# EAGLE board JesseMakeISC2 (EAGLE 7.5.0), part 1 of 2
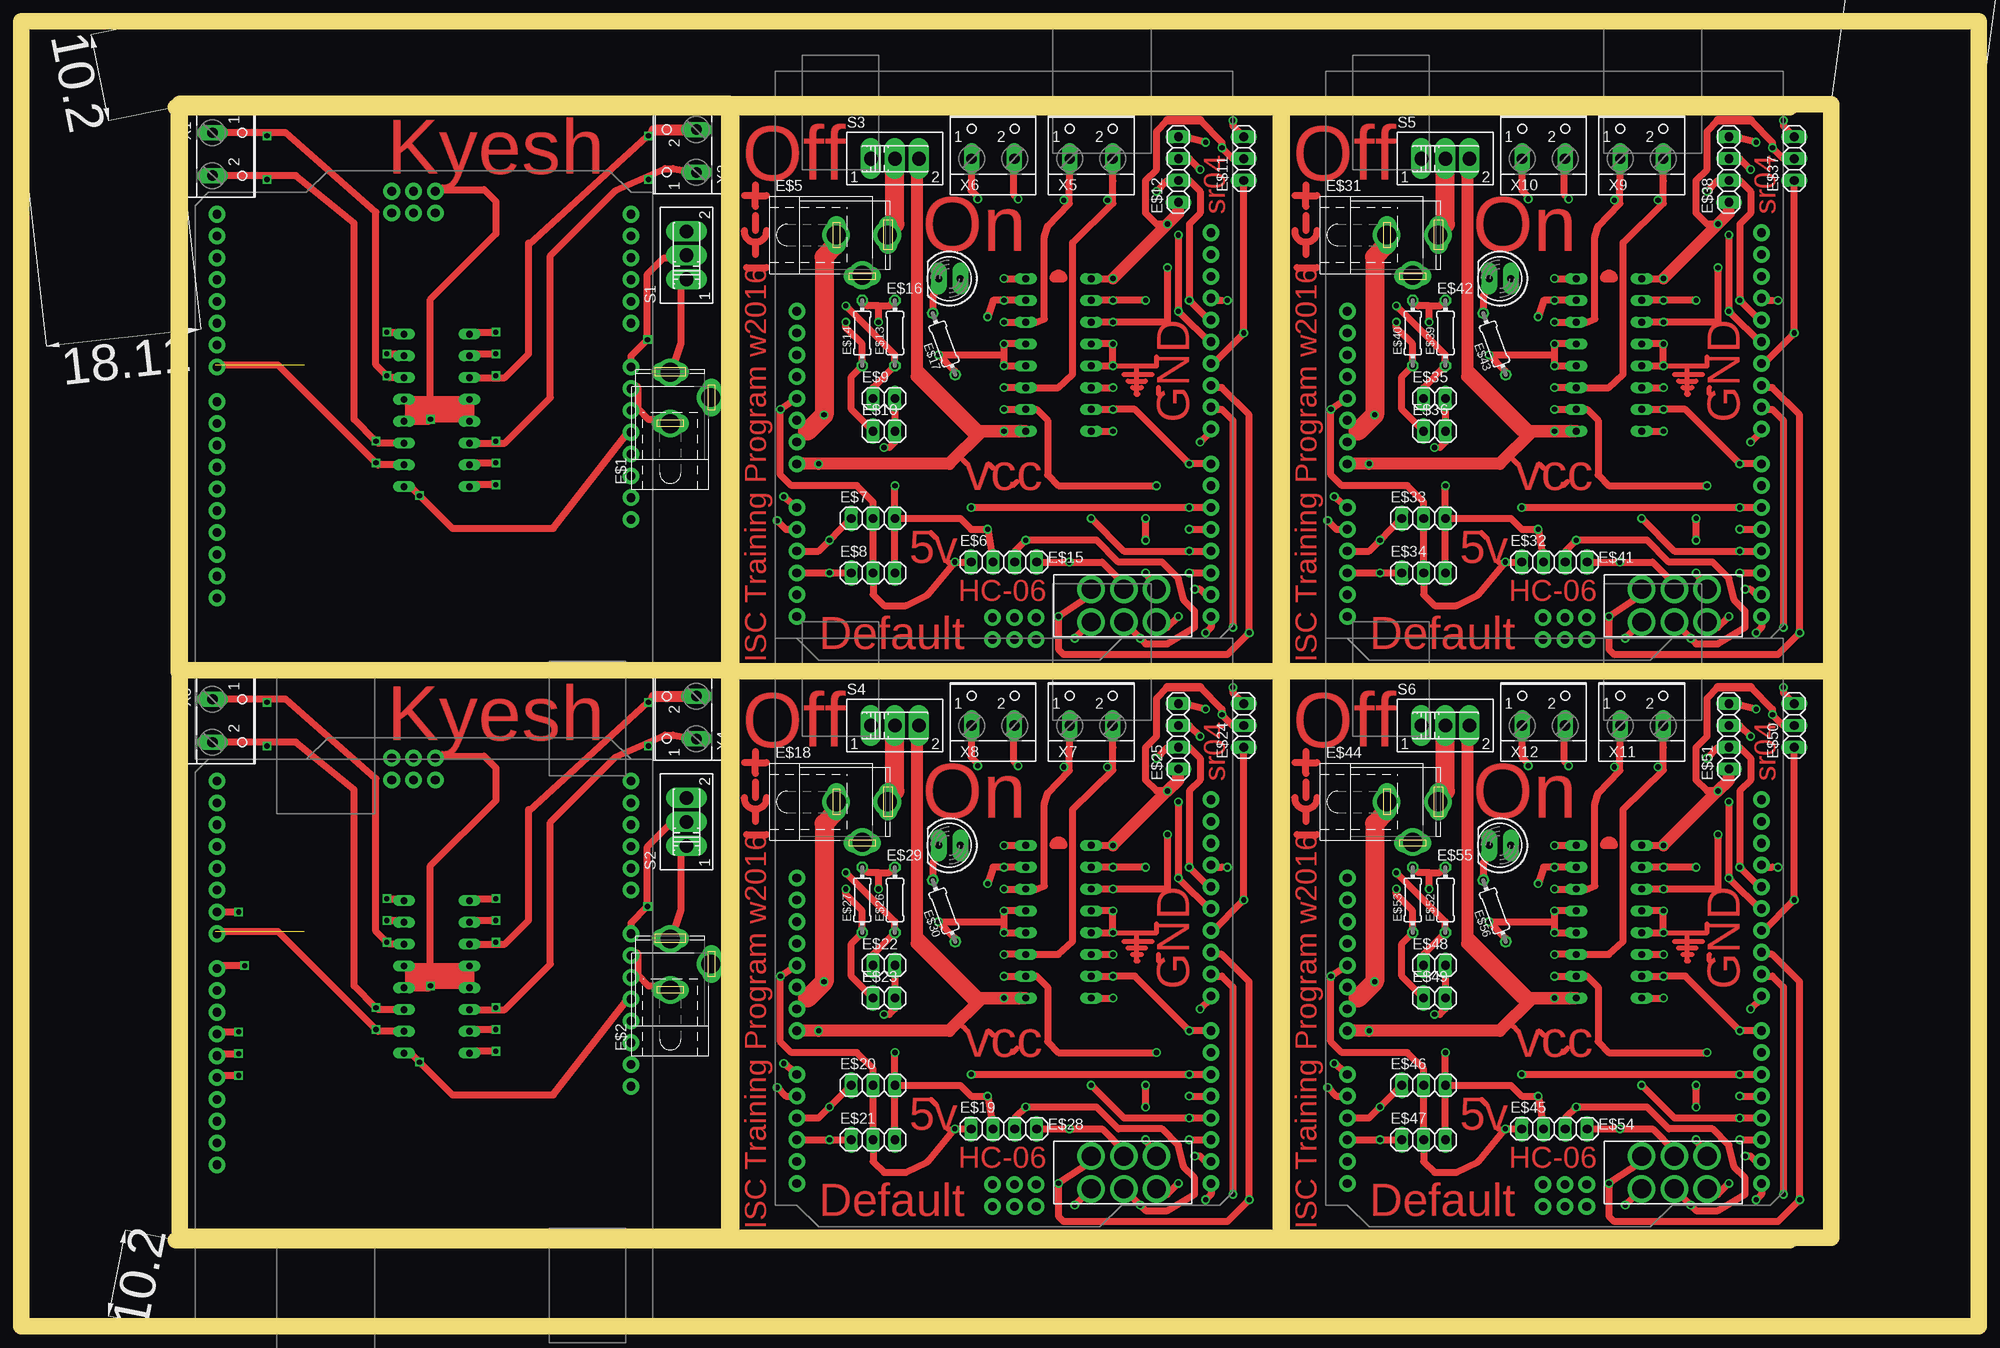
[diagram p0: board, top side]
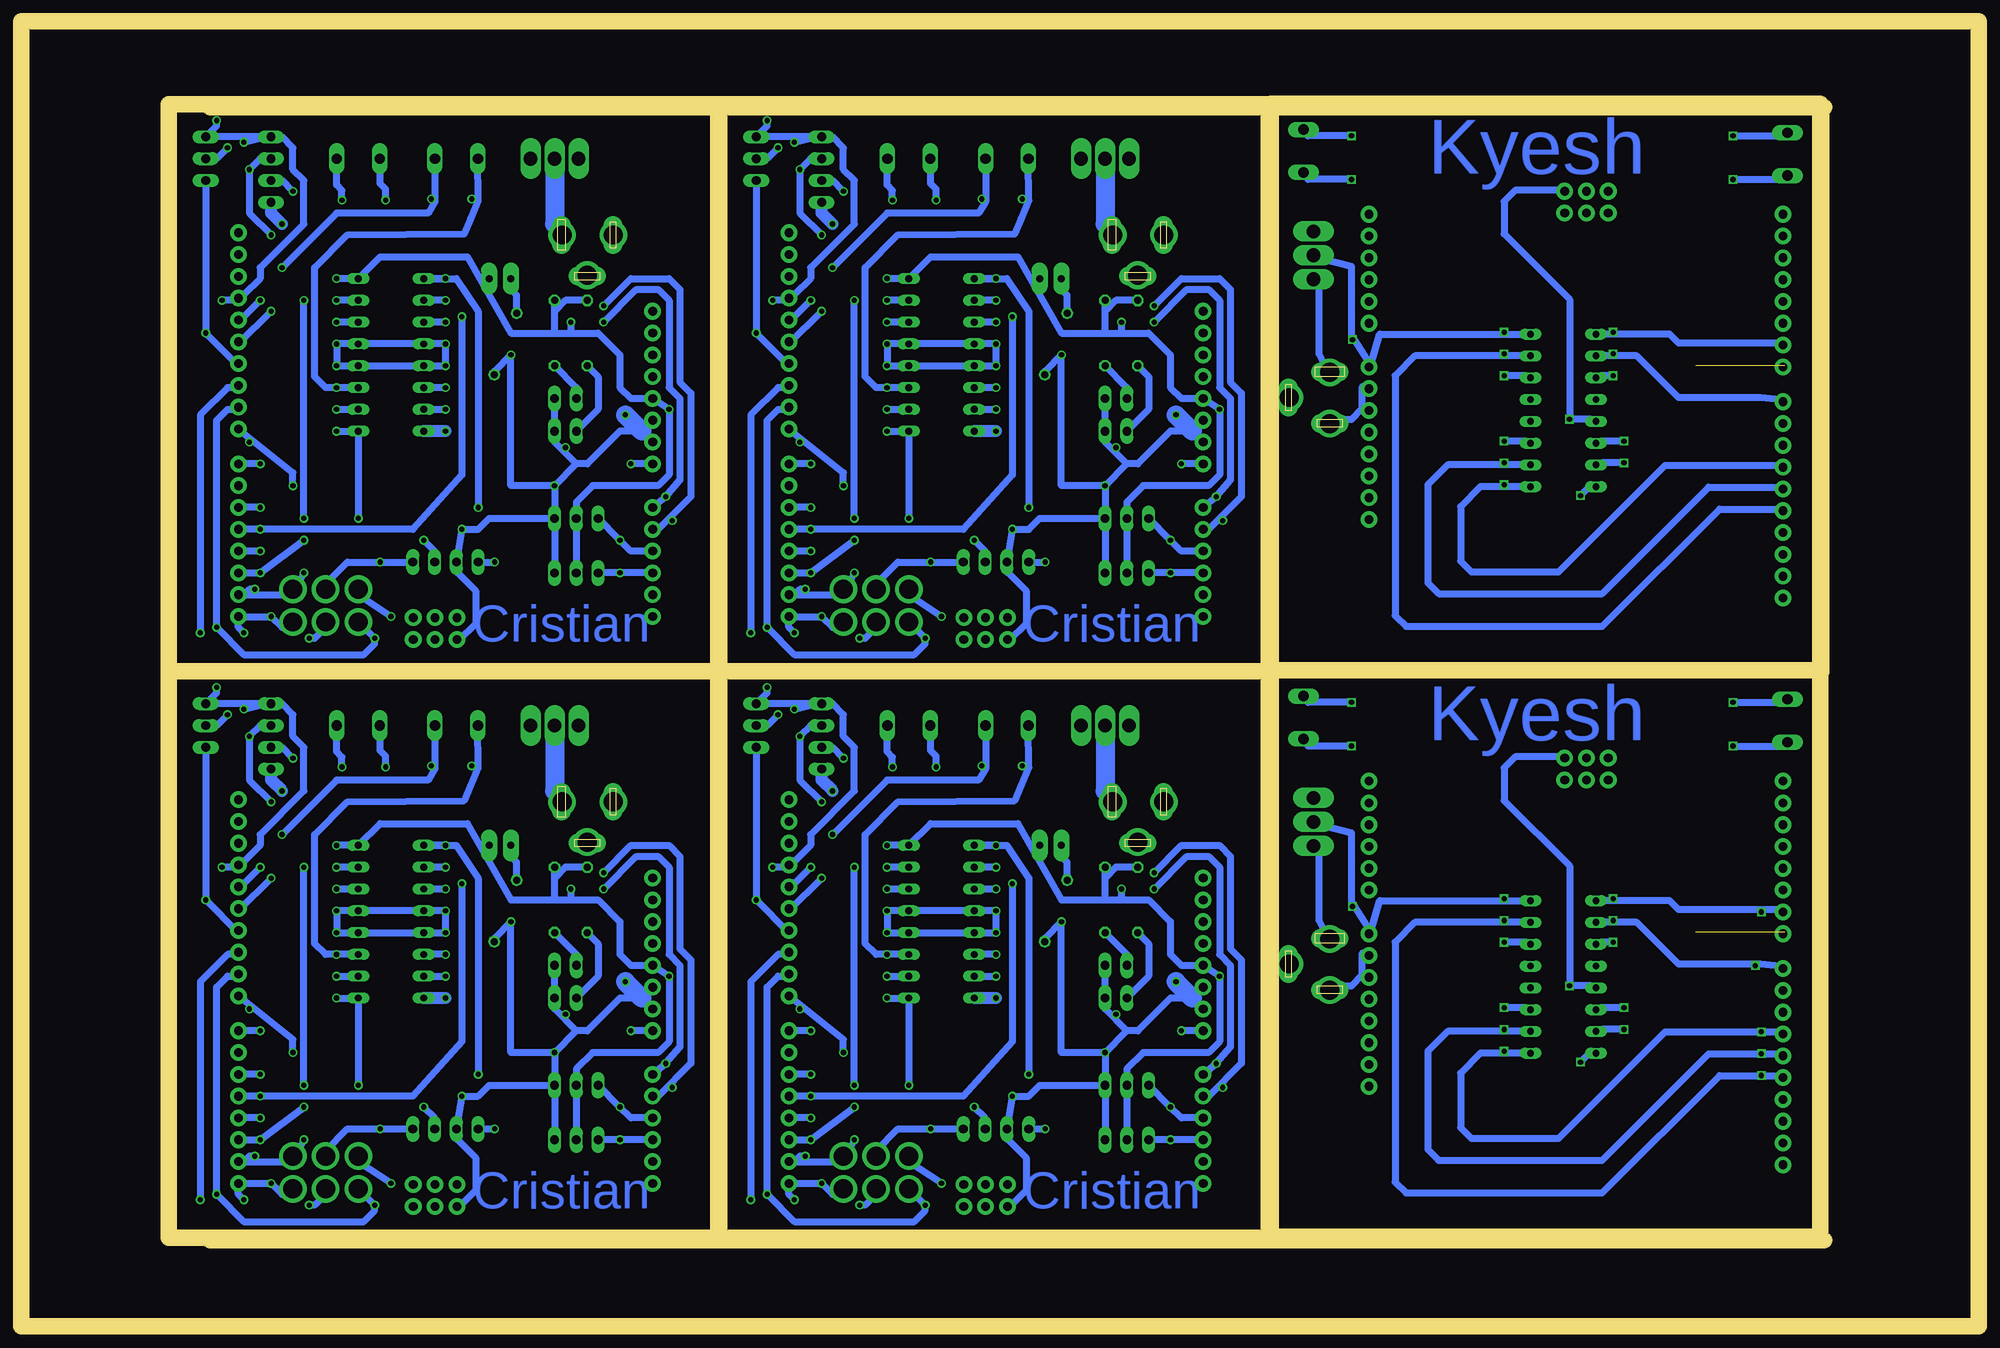
[diagram p1: board, bottom side, seen from below]

Size 228 x 152 mm. Coordinates in mm from the lower left corner, seen from the top.
Outline: 18,10 206,10
Outline: 206,142 18,142
Outline: 18.32,76.2 18.32,142.2 82.32,142.2
Outline: 118.32,10.16 82.32,10.16 18.32,10.16
Outline: 18.32,90.16 18.32,76.16
Outline: 82.11,142.25 146.11,142.25
Outline: 146.11,10.21 82.11,10.21
Outline: 18.44,76.44 18.44,142.44 82.44,142.44 82.44,76.44
Outline: 18.44,76.44 18.44,10.44 82.44,10.44 82.44,76.44
Outline: 18.44,76.44 82.44,76.44
Outline: 0,0 0,152 228,152 228,0 0,0
Outline: 82.71,76.33 82.71,142.33 146.71,142.33 146.71,76.33 82.71,76.33
Outline: 82.71,10.29 82.71,76.29 146.71,76.29 146.71,10.29 82.71,10.29
Outline: 146.84,76.33 146.84,142.33 210.84,142.33 210.84,76.33 146.84,76.33
Outline: 146.84,10.29 146.84,76.29 210.84,76.29 210.84,10.29 146.84,10.29
Copper layers (1*16): Top 0.035mm / dielectric 1.5mm / Bottom 0.035mm
Design rules "default": minimum track width 10mil, minimum drill 0.6mm, track to track 8mil, track to pad 8mil, pad to pad 8mil, via to via 8mil, smd to smd 8mil, copper to edge 40mil, drill to drill 8mil, minimum pad ring 10mil, minimum via ring 8mil, stop-mask expansion 4mil, vias tented up to drill 0mil, thermal gap 10mil

## Footprints (pad centres in the part's own frame; a part is rotated, then mirrored left to right if it is on the bottom)
5.5-2.5-BARRELCONNECTOR = drill 0.8 pad 2.184 long: 1 -3,0; 2 0,-4.8 | drill 1 pad 2.184 long: 3 3,0 | drill 2.2: P$1 -3.048,0; P$2 2.921,0; P$3 0,-4.699
ARDUINO_R3 = drill 1.016 pad 1.93: 3.3V 35.56,2.54; 5V 38.1,2.54; A0 50.8,2.54; A1 53.34,2.54; A2 55.88,2.54; A3 58.42,2.54; A4 60.96,2.54; A5 63.5,2.54; AREF 23.876,50.8; D0 63.5,50.8; D1 60.96,50.8; D2 58.42,50.8; D3 55.88,50.8; D4 53.34,50.8; D5 50.8,50.8; D6 48.26,50.8; D7 45.72,50.8; D8 41.656,50.8; D9 39.116,50.8; D10 36.576,50.8; D11 34.036,50.8; D12 31.496,50.8; D13 28.956,50.8; GND@1 40.64,2.54; GND@2 43.18,2.54; GND@3 26.416,50.8; GND@4 66.18,25.35; IOREF 30.48,2.54; MISO 63.64,30.43; MOSI 66.18,27.89; NC 27.94,2.54; RESET@1 33.02,2.54; RESET@2 63.64,25.35; SCK 63.64,27.89; SCL 18.796,50.8; SDA 21.336,50.8; VCC 66.18,30.43; VIN 45.72,2.54
1X04 = drill 1.016 long: 1 -3.81,0; 2 -1.27,0; 3 1.27,0; 4 3.81,0
1X03 = drill 1.016 long: 1 -2.54,0; 2 0,0; 3 2.54,0
1X02 = drill 1.016 long: 1 -1.27,0; 2 1.27,0
0204/7 = drill 0.813 octagon: 1 -3.81,0; 2 3.81,0
DUAL_SLIDE_SWITCH = drill 2.2: 1 -3.81,-1.905; 2 0,-1.905; 3 3.81,-1.905; 4 -3.81,1.905; 5 0,1.905; 6 3.81,1.905
LED5MM = drill 0.813 pad 1.88 long: A -1.27,0; K 1.27,0
DIP16 = drill 0.8 long: P1 -8.89,-3.81; P2 -6.35,-3.81; P3 -3.81,-3.81; P4 -1.27,-3.81; P5 1.27,-3.81; P6 3.81,-3.81; P7 6.35,-3.81; P8 8.89,-3.81; P9 8.89,3.81; P10 6.35,3.81; P11 3.81,3.81; P12 1.27,3.81; P13 -1.27,3.81; P14 -3.81,3.81; P15 -6.35,3.81; P16 -8.89,3.81
SLIDE_SWITCH = drill 1.6 long: 1 -2.794,0; 2 0,0; 3 2.794,0
2PIN-SCREW-TERMINAL = drill 1.194 long: 1 -2.5,-1.27; 2 2.5,-1.27

## Placement (x,y rotation side)
E$1  [5.5-2.5-BARRELCONNECTOR]  75.59,108.19 90 top
E$2  [5.5-2.5-BARRELCONNECTOR]  75.59,42.19 90 top
E$3  [ARDUINO_R3]  73.56,66.04 90 top
E$4  [ARDUINO_R3]  73.56,0 90 top
E$5  [5.5-2.5-BARRELCONNECTOR]  97.95,127.13 0 top
E$6  [1X04]  114.46,89.03 0 top
E$7  [1X03]  99.22,94.11 0 top
E$8  [1X03]  99.22,87.76 0 top
E$9  [1X02]  100.49,108.08 0 top
E$10  [1X02]  100.49,104.27 0 top
E$11  [1X03]  142.4,136.02 90 top
E$12  [1X04]  134.78,134.75 90 top
E$13  [0204/7]  101.76,115.7 90 top
E$14  [0204/7]  97.95,115.7 90 top
E$15  [DUAL_SLIDE_SWITCH]  128.43,83.95 0 top
E$16  [LED5MM]  108.11,122.05 180 top
E$17  [0204/7]  107.47,114.43 110 top
E$18  [5.5-2.5-BARRELCONNECTOR]  97.95,61.09 0 top
E$19  [1X04]  114.46,22.99 0 top
E$20  [1X03]  99.22,28.07 0 top
E$21  [1X03]  99.22,21.72 0 top
E$22  [1X02]  100.49,42.04 0 top
E$23  [1X02]  100.49,38.23 0 top
E$24  [1X03]  142.4,69.98 90 top
E$25  [1X04]  134.78,68.71 90 top
E$26  [0204/7]  101.76,49.66 90 top
E$27  [0204/7]  97.95,49.66 90 top
E$28  [DUAL_SLIDE_SWITCH]  128.43,17.91 0 top
E$29  [LED5MM]  108.11,56.01 180 top
E$30  [0204/7]  107.47,48.39 110 top
E$31  [5.5-2.5-BARRELCONNECTOR]  162.08,127.13 0 top
E$32  [1X04]  178.59,89.03 0 top
E$33  [1X03]  163.35,94.11 0 top
E$34  [1X03]  163.35,87.76 0 top
E$35  [1X02]  164.62,108.08 0 top
E$36  [1X02]  164.62,104.27 0 top
E$37  [1X03]  206.53,136.02 90 top
E$38  [1X04]  198.91,134.75 90 top
E$39  [0204/7]  165.89,115.7 90 top
E$40  [0204/7]  162.08,115.7 90 top
E$41  [DUAL_SLIDE_SWITCH]  192.56,83.95 0 top
E$42  [LED5MM]  172.24,122.05 180 top
E$43  [0204/7]  171.61,114.43 110 top
E$44  [5.5-2.5-BARRELCONNECTOR]  162.08,61.09 0 top
E$45  [1X04]  178.59,22.99 0 top
E$46  [1X03]  163.35,28.07 0 top
E$47  [1X03]  163.35,21.72 0 top
E$48  [1X02]  164.62,42.04 0 top
E$49  [1X02]  164.62,38.23 0 top
E$50  [1X03]  206.53,69.98 90 top
E$51  [1X04]  198.91,68.71 90 top
E$52  [0204/7]  165.89,49.66 90 top
E$53  [0204/7]  162.08,49.66 90 top
E$54  [DUAL_SLIDE_SWITCH]  192.56,17.91 0 top
E$55  [LED5MM]  172.24,56.01 180 top
E$56  [0204/7]  171.61,48.39 110 top
ENABLE  MOTOR_DRIVERDIP16  [DIP16]  48.38,106.69 90 top
ENABLE1  MOTOR_DRIVERDIP16  [DIP16]  48.38,40.69 90 top
J1  ARDUINO_UNO_R3  [ARDUINO_R3]  87.79,146.18 270 top
J2  ARDUINO_UNO_R3  [ARDUINO_R3]  87.79,80.14 270 top
J3  ARDUINO_UNO_R3  [ARDUINO_R3]  151.92,146.18 270 top
J4  ARDUINO_UNO_R3  [ARDUINO_R3]  151.92,80.14 270 top
S1  [SLIDE_SWITCH]  77.48,124.75 90 top
S2  [SLIDE_SWITCH]  77.48,58.75 90 top
S3  [SLIDE_SWITCH]  101.76,136.02 0 top
S4  [SLIDE_SWITCH]  101.76,69.98 0 top
S5  [SLIDE_SWITCH]  165.89,136.02 0 top
S6  [SLIDE_SWITCH]  165.89,69.98 0 top
U$1  MOTOR_DRIVERDIP16  [DIP16]  120.81,113.16 270 top
U$2  MOTOR_DRIVERDIP16  [DIP16]  120.81,47.12 270 top
U$3  MOTOR_DRIVERDIP16  [DIP16]  184.94,113.16 270 top
U$4  MOTOR_DRIVERDIP16  [DIP16]  184.94,47.12 270 top
X1  [2PIN-SCREW-TERMINAL]  23.52,136.54 270 top
X2  [2PIN-SCREW-TERMINAL]  77.36,136.91 90 top
X3  [2PIN-SCREW-TERMINAL]  23.52,70.54 270 top
X4  [2PIN-SCREW-TERMINAL]  77.36,70.91 90 top
X5  [2PIN-SCREW-TERMINAL]  124.62,137.29 0 top
X6  [2PIN-SCREW-TERMINAL]  113.19,137.29 0 top
X7  [2PIN-SCREW-TERMINAL]  124.62,71.25 0 top
X8  [2PIN-SCREW-TERMINAL]  113.19,71.25 0 top
X9  [2PIN-SCREW-TERMINAL]  188.75,137.29 0 top
X10  [2PIN-SCREW-TERMINAL]  177.32,137.29 0 top
X11  [2PIN-SCREW-TERMINAL]  188.75,71.25 0 top
X12  [2PIN-SCREW-TERMINAL]  177.32,71.25 0 top

## Library data of the parts
E$1-E$56 ENABLE ENABLE1 J1-J4 S1-S6 U$1-U$4 = ISCTRainingProgram
X1-X12 = ISCTRainingProgram; MPN: 237-102; OC_FARNELL: unknown; OC_NEWARK: 70K9898

## Nets
ENABLE: ENABLE.P1
ENABLE1: ENABLE1.P1
GND: ENABLE.P4 ENABLE.P5 ENABLE.P12
GND1: ENABLE1.P4 ENABLE1.P5 ENABLE1.P12
N$1: ENABLE.P3 X2.1
N$2: ENABLE.P13
N$3: ENABLE.P16
N$4: ENABLE.P8 S1.2
N$5: ENABLE.P6
N$6: ENABLE.P11 X1.1
N$7: ENABLE.P14 X1.2
N$8: ENABLE.P10
N$9: ENABLE.P2
N$10: ENABLE.P7
N$11: ENABLE.P9
N$12: ENABLE.P15
N$17: ENABLE1.P3 X4.1
N$18: ENABLE1.P13
N$22: ENABLE1.P16
N$23: ENABLE1.P8 S2.2
N$24: ENABLE1.P6
N$25: ENABLE1.P11 X3.1
N$26: ENABLE1.P14 X3.2
N$27: ENABLE1.P2
N$28: ENABLE1.P7
N$29: ENABLE1.P9
N$30: ENABLE1.P15
N$31: ENABLE1.P10
N$39: U$1.P6 X5.2
N$40: U$1.P14 X6.2
N$42: U$1.P11 X6.1
N$43: E$6.1 E$8.2 E$12.1 E$13.2 E$14.2 J1.5V U$1.P16
N$44: E$6.2 E$8.3 E$9.2 U$1.P4 U$1.P5 U$1.P12 U$1.P13
N$45: J1.VIN S3.3 U$1.P8
N$46: J1.D2 U$1.P15
N$47: J1.D3 U$1.P9
N$48: J1.D7 U$1.P10
N$49: J1.D5 U$1.P1
N$50: J1.D4 U$1.P2
N$51: U$1.P3 X5.1
N$52: J1.D8 U$1.P7
N$53: U$2.P6 X7.2
N$54: U$2.P14 X8.2
N$55: U$2.P11 X8.1
N$56: E$19.1 E$21.2 E$25.1 E$26.2 E$27.2 J2.5V U$2.P16
N$57: E$19.2 E$21.3 E$22.2 U$2.P4 U$2.P5 U$2.P12 U$2.P13
N$58: J2.VIN S4.3 U$2.P8
N$59: J2.D2 U$2.P15
N$60: J2.D3 U$2.P9
N$61: J2.D7 U$2.P10
N$62: J2.D5 U$2.P1
N$63: J2.D4 U$2.P2
N$64: U$2.P3 X7.1
N$65: J2.D8 U$2.P7
N$66: U$3.P6 X9.2
N$67: U$3.P14 X10.2
N$68: U$3.P11 X10.1
N$69: E$32.1 E$34.2 E$38.1 E$39.2 E$40.2 J3.5V U$3.P16
N$70: E$32.2 E$34.3 E$35.2 U$3.P4 U$3.P5 U$3.P12 U$3.P13
N$71: J3.VIN S5.3 U$3.P8
N$72: J3.D2 U$3.P15
N$73: J3.D3 U$3.P9
N$74: J3.D7 U$3.P10
N$75: J3.D5 U$3.P1
N$76: J3.D4 U$3.P2
N$77: U$3.P3 X9.1
N$78: J3.D8 U$3.P7
N$79: U$4.P6 X11.2
N$80: U$4.P14 X12.2
N$81: U$4.P11 X12.1
N$82: E$45.1 E$47.2 E$51.1 E$52.2 E$53.2 J4.5V U$4.P16
N$83: E$45.2 E$47.3 E$48.2 U$4.P4 U$4.P5 U$4.P12 U$4.P13
N$84: J4.VIN S6.3 U$4.P8
N$85: J4.D2 U$4.P15
N$86: J4.D3 U$4.P9
N$87: J4.D7 U$4.P10
N$88: J4.D5 U$4.P1
N$89: J4.D4 U$4.P2
N$90: U$4.P3 X11.1
N$91: J4.D8 U$4.P7
S$17: E$4.VIN
S$19: E$4.D6
S$24: S3.2
S$27: E$11.3 E$12.4
S$28: E$12.3
S$32: E$11.1
S$33: E$13.1
S$34: E$10.1 E$14.1 J1.A0
S$36: E$7.1 J1.A2
S$37: E$8.1 J1.A3
S$38: J1.A1
S$40: J1.D0
S$43: J1.D1
S$45: E$6.4
S$70: S4.2
S$73: E$24.3 E$25.4
S$74: E$25.3
S$78: E$24.1
S$79: E$26.1
S$80: E$23.1 E$27.1 J2.A0
S$82: E$20.1 J2.A2
S$83: E$21.1 J2.A3
S$84: J2.A1
S$86: J2.D0
S$89: J2.D1
S$91: E$19.4
S$116: S5.2
S$119: E$37.3 E$38.4
S$120: E$38.3
S$124: E$37.1
S$125: E$39.1
S$126: E$36.1 E$40.1 J3.A0
S$128: E$33.1 J3.A2
S$129: E$34.1 J3.A3
S$130: J3.A1
S$132: J3.D0
S$135: J3.D1
S$137: E$32.4
S$162: S6.2
S$165: E$50.3 E$51.4
S$166: E$51.3
S$170: E$50.1
S$171: E$52.1
S$172: E$49.1 E$53.1 J4.A0
S$174: E$46.1 J4.A2
S$175: E$47.1 J4.A3
S$176: J4.A1
S$178: J4.D0
S$181: J4.D1
S$183: E$45.4